# EAGLE board sch-FIX_2 (EAGLE 5.11)
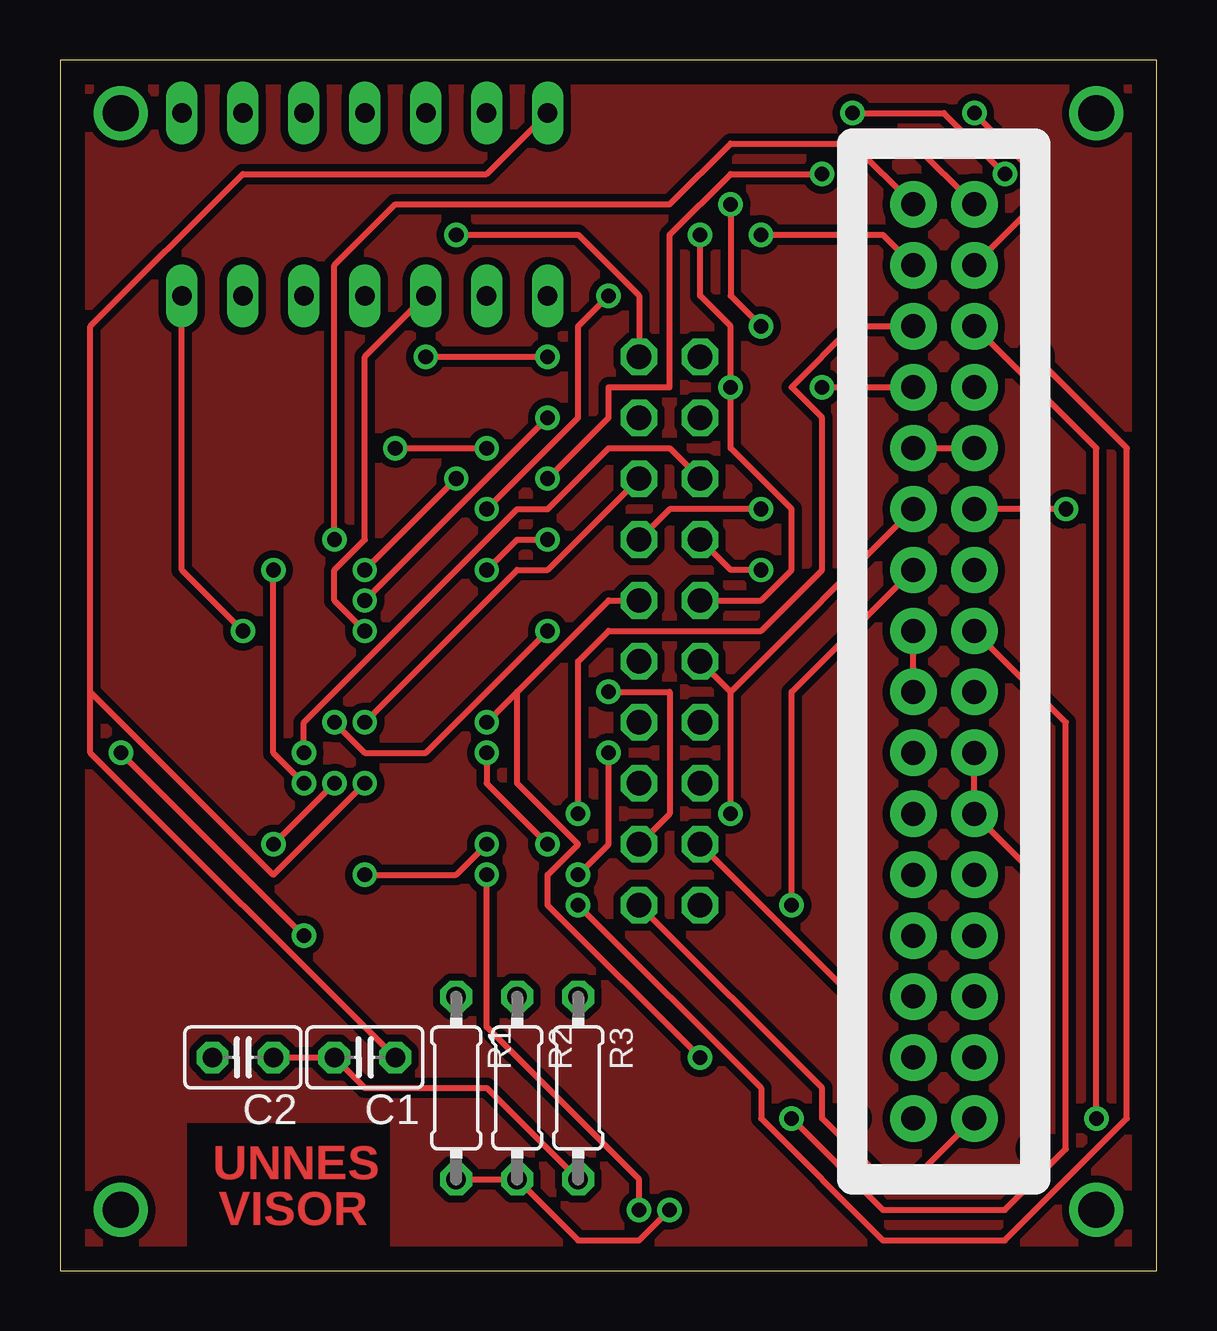
[diagram p0: board, top side]
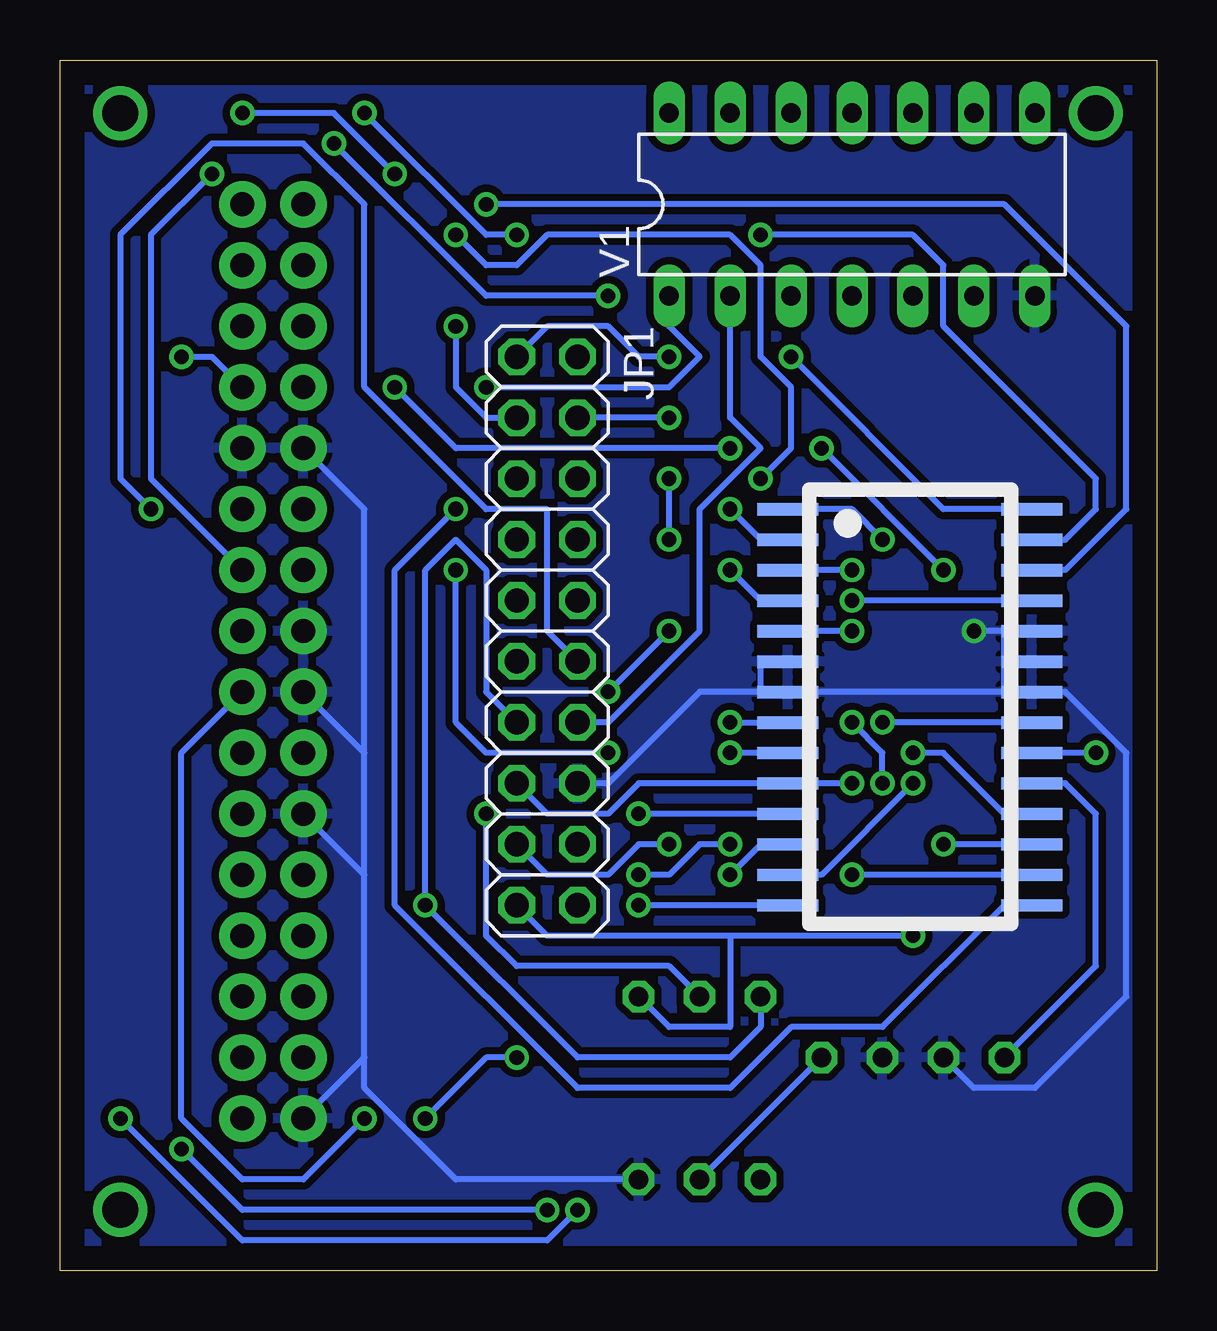
[diagram p1: board, bottom side, seen from below]

Size 45.7 x 50.47 mm. Coordinates in mm from the lower left corner, seen from the top.
Outline: 0,0 45.7,0 45.7,50.47 0,50.47 0,0
Copper layers (1*16): Top 0.035mm / dielectric 1.5mm / Bottom 0.035mm
Design rules "default": minimum track width 10mil, minimum drill 24mil, track to track 8mil, track to pad 8mil, pad to pad 8mil, via to via 8mil, smd to smd 8mil, copper to edge 40mil, drill to drill 8mil, minimum pad ring 10mil, minimum via ring 8mil, stop-mask expansion 4mil, vias tented up to drill 0mil, thermal gap 10mil

## Footprints (pad centres in the part's own frame; a part is rotated, then mirrored left to right if it is on the bottom)
C025-025X050 = drill 0.813 octagon: 1 -1.27,0; 2 1.27,0
2X10 = drill 1.016 octagon: 1 -11.43,-1.27; 2 -11.43,1.27; 3 -8.89,-1.27; 4 -8.89,1.27; 5 -6.35,-1.27; 6 -6.35,1.27; 7 -3.81,-1.27; 8 -3.81,1.27; 9 -1.27,-1.27; 10 -1.27,1.27; 11 1.27,-1.27; 12 1.27,1.27; 13 3.81,-1.27; 14 3.81,1.27; 15 6.35,-1.27; 16 6.35,1.27; 17 8.89,-1.27; 18 8.89,1.27; 19 11.43,-1.27; 20 11.43,1.27
0204/7 = drill 0.813 octagon: 1 -3.81,0; 2 3.81,0
AL422 = smd 2.54 x 0.51: 1 -5.21,7.61; 2 -5.21,6.34; 3 -5.21,5.07; 4 -5.21,3.8; 5 -5.21,2.53; 6 -5.21,1.26; 7 -5.21,-0.01; 8 -5.21,-1.28; 9 -5.21,-2.55; 10 -5.21,-3.82; 11 -5.21,-5.09; 12 -5.21,-6.36; 13 -5.21,-7.63; 14 -5.21,-8.9; 15 4.95,-8.9; 16 4.95,-7.63; 17 4.95,-6.36; 18 4.95,-5.09; 19 4.95,-3.82; 20 4.95,-2.55; 21 4.95,-1.28; 22 4.95,-0.01; 23 4.95,1.26; 24 4.95,2.53; 25 4.95,3.8; 26 4.95,5.07; 27 4.95,6.34; 28 4.95,7.61
C3088MODULE = drill 1 pad 1.93 round: P$1 -1.27,19.05; P$2 1.27,19.05; P$3 -1.27,16.51; P$4 1.27,16.51; P$5 -1.27,13.97; P$6 1.27,13.97; P$7 -1.27,11.43; P$8 1.27,11.43; P$9 -1.27,8.89; P$10 1.27,8.89; P$11 -1.27,6.35; P$12 1.27,6.35; P$13 -1.27,3.81; P$14 1.27,3.81; P$15 -1.27,1.27; P$16 1.27,1.27; P$17 -1.27,-1.27; P$18 1.27,-1.27; P$19 -1.27,-3.81; P$20 1.27,-3.81; P$21 -1.27,-6.35; P$22 1.27,-6.35; P$23 -1.27,-8.89; P$24 1.27,-8.89; P$25 -1.27,-11.43; P$26 1.27,-11.43; P$27 -1.27,-13.97; P$28 1.27,-13.97; P$29 -1.27,-16.51; P$30 1.27,-16.51; P$31 -1.27,-19.05; P$32 1.27,-19.05
DIL14 = drill 0.813 long: 1 -7.62,-3.81; 2 -5.08,-3.81; 3 -2.54,-3.81; 4 0,-3.81; 5 2.54,-3.81; 6 5.08,-3.81; 7 7.62,-3.81; 8 7.62,3.81; 9 5.08,3.81; 10 2.54,3.81; 11 0,3.81; 12 -2.54,3.81; 13 -5.08,3.81; 14 -7.62,3.81

## Placement (x,y rotation side)
C1  0.1uf  [C025-025X050]  12.7,8.89 180 top
C2  22uf  [C025-025X050]  7.62,8.89 180 top
JP1  [2X10]  25.4,26.67 270 bottom
R1  4k7  [0204/7]  16.51,7.62 270 top
R2  4k7  [0204/7]  19.05,7.62 270 top
R3  1k  [0204/7]  21.59,7.62 270 top
U$1  AL422B  [AL422]  10.16,24.13 0 bottom
U$2  C3088MODULE  [C3088MODULE]  36.83,25.4 0 top
V1  74HCT00N  [DIL14]  12.7,44.45 0 bottom

## Library data of the parts
C1 C2 R1-R3 = rcl
JP1 = pinhead
U$1 U$2 = Tugas-Akhir-Sistem-Mikroprossesor
V1 = 74ttl-din

## Nets
/FIFO_READ_RESET: JP1.18 U$1.21
DATA0: U$1.1 U$2.P$1
DATA1: U$1.2 U$2.P$2
DATA2: U$1.3 U$2.P$3
DATA3: U$1.4 U$2.P$4
DATA4: U$1.11 U$2.P$5
DATA5: U$1.12 U$2.P$6
DATA6: U$1.13 U$2.P$7
DATA7: U$1.14 U$2.P$8
FIFO_DATA_OUT0: JP1.1 U$1.28
FIFO_DATA_OUT1: JP1.2 U$1.27
FIFO_DATA_OUT2: JP1.3 U$1.26
FIFO_DATA_OUT3: JP1.4 U$1.25
FIFO_DATA_OUT4: JP1.5 U$1.18
FIFO_DATA_OUT5: JP1.6 U$1.17
FIFO_DATA_OUT6: JP1.7 U$1.16
FIFO_DATA_OUT7: JP1.8 U$1.15
FIFO_READ_CLOCK: JP1.19 R3.1 U$1.20
FIFO_WRITE_ENABLE: JP1.14 V1.2
GND: C1.2 C2.1 JP1.16 R3.2 U$1.6 U$1.7 U$1.22 U$1.23 U$1.24 U$2.P$9 U$2.P$10 U$2.P$15 U$2.P$17 U$2.P$21 U$2.P$31 V1.7
HORIZONTAL_REFERENCE: JP1.9 U$2.P$14 V1.1
N$1: JP1.20 U$2.P$32
N$2: U$1.5 V1.3
N$3: JP1.17 U$1.9 U$2.P$18
N$10: C2.2 U$1.19
OV6620_FODD: JP1.12 U$2.P$12
OV6620_SCL: JP1.13 R1.1 U$2.P$13
OV6620_SDA: JP1.11 R2.1 U$2.P$11
VCC: C1.1 JP1.15 R1.2 R2.2 U$1.10 U$2.P$20 U$2.P$22 V1.14
VERTICAL_SYNCRONIZATION: JP1.10 U$1.8 U$2.P$16

## Tracks (layer width: path | path; a pad name or v marks a point on that pad's centre or on a via)
/FIFO_READ_RESET  (via drill 0.61)
  Top 0.254: v11.43,22.86 12.7,21.59 15.24,21.59 v20.32,26.67 | v22.86,24.13 25.4,24.13 25.4,19.05 JP1.18
  Bottom 0.254: v11.43,22.86 6.35,22.86 U$1.21 | v20.32,26.67 v22.86,24.13
DATA0  (via drill 0.61)
  Top 0.254: v11.43,30.48 11.43,41.91 13.97,44.45 25.4,44.45 27.94,46.99 33.02,46.99 U$2.P$1
  Bottom 0.254: v11.43,30.48 12.7,31.75 15.24,31.75 U$1.1
DATA1  (via drill 0.61)
  Top 0.254: v17.78,31.75 21.59,35.56 21.59,39.37 v22.86,40.64 | v34.29,46.99 35.56,46.99 U$2.P$2
  Bottom 0.254: v17.78,31.75 16.51,30.48 U$1.2 | v22.86,40.64 27.94,40.64 v34.29,46.99
DATA2  (via drill 0.61)
  Top 0.254: v12.7,29.21 v16.51,33.02 | v29.21,43.18 34.29,43.18 U$2.P$3
  Bottom 0.254: v12.7,29.21 15.24,29.21 U$1.3 | v16.51,33.02 15.24,34.29 15.24,36.83 16.51,38.1 16.51,41.91 17.78,43.18 25.4,43.18 26.67,41.91 27.94,41.91 v29.21,43.18
DATA3  (via drill 0.61)
  Top 0.254: v17.78,29.21 19.05,30.48 v20.32,30.48 | v20.32,33.02 22.86,35.56 22.86,36.83 25.4,36.83 25.4,43.18 27.94,45.72 v31.75,45.72 | v38.1,48.26 40.64,45.72 40.64,44.45 U$2.P$4
  Bottom 0.254: v17.78,29.21 16.51,27.94 U$1.4 | v20.32,30.48 v20.32,33.02 | v31.75,45.72 34.29,48.26 v38.1,48.26
DATA4  (via drill 0.61)
  Top 0.254: v21.59,19.05 21.59,25.4 22.86,26.67 29.21,26.67 31.75,29.21 31.75,35.56 30.48,36.83 33.02,39.37 U$2.P$5
  Bottom 0.254: v21.59,19.05 16.51,19.05 U$1.11
DATA5  (via drill 0.61)
  Top 0.254: v17.78,16.51 17.78,10.16 24.13,3.81 v24.13,2.54 | v43.18,6.35 43.18,34.29 U$2.P$6
  Bottom 0.254: v17.78,16.51 16.51,17.78 U$1.12 | v24.13,2.54 25.4,1.27 38.1,1.27 v43.18,6.35
DATA6  (via drill 0.61)
  Top 0.254: v10.16,20.32 8.89,21.59 v8.89,29.21 | v13.97,34.29 v17.78,34.29 | v31.75,36.83 U$2.P$7
  Bottom 0.254: v10.16,20.32 13.97,16.51 15.24,16.51 U$1.13 | v8.89,29.21 v13.97,34.29 | v17.78,34.29 29.21,34.29 v31.75,36.83
DATA7  (via drill 0.61)
  Top 0.254: v21.59,15.24 29.21,7.62 29.21,6.35 34.29,1.27 39.37,1.27 44.45,6.35 44.45,34.29 v40.64,38.1
  Bottom 0.254: v21.59,15.24 16.51,15.24 U$1.14 | v40.64,38.1 39.37,38.1 U$2.P$8
FIFO_DATA_OUT0  (via drill 0.61)
  Top 0.254: v15.24,38.1 v20.32,38.1
  Bottom 0.254: v15.24,38.1 8.89,31.75 6.35,31.75 U$1.28 | v20.32,38.1 21.59,38.1 22.86,39.37 25.4,39.37 JP1.1
FIFO_DATA_OUT1  (via drill 0.61)
  Top 0.254: v16.51,43.18 21.59,43.18 24.13,40.64 JP1.2
  Bottom 0.254: v16.51,43.18 10.16,43.18 8.89,41.91 8.89,39.37 2.54,33.02 2.54,31.75 3.81,30.48 5.08,30.48 U$1.27
FIFO_DATA_OUT2  (via drill 0.61)
  Top 0.254: v27.94,44.45 27.94,40.64 v29.21,39.37
  Bottom 0.254: v27.94,44.45 6.35,44.45 1.27,39.37 1.27,31.75 3.81,29.21 5.08,29.21 U$1.26 | v29.21,39.37 29.21,36.83 27.94,35.56 JP1.3
FIFO_DATA_OUT3  (via drill 0.61)
  Top 0.254: v12.7,27.94 v20.32,35.56
  Bottom 0.254: v12.7,27.94 6.35,27.94 U$1.25 | v20.32,35.56 JP1.4
FIFO_DATA_OUT4  (via drill 0.61)
  Top 0.254: v10.16,21.59 10.16,22.86 19.05,31.75 20.32,31.75 22.86,34.29 25.4,34.29 JP1.5
  Bottom 0.254: v10.16,21.59 8.89,21.59 6.35,19.05 U$1.18
FIFO_DATA_OUT5  (via drill 0.61)
  Top 0.254: v8.89,17.78 v11.43,20.32 | v12.7,22.86 19.05,29.21 20.32,29.21 JP1.6
  Bottom 0.254: v8.89,17.78 6.35,17.78 U$1.17 | v11.43,20.32 11.43,21.59 v12.7,22.86
FIFO_DATA_OUT6  (via drill 0.61)
  Top 0.254: v12.7,16.51 16.51,16.51 v17.78,17.78 | v21.59,16.51 22.86,17.78 v22.86,21.59 | v29.21,29.21 27.94,29.21 JP1.7
  Bottom 0.254: v12.7,16.51 6.35,16.51 U$1.16 | v17.78,17.78 19.05,17.78 20.32,16.51 v21.59,16.51 | v22.86,21.59 27.94,21.59 29.21,22.86 v29.21,29.21
FIFO_DATA_OUT7  (via drill 0.61)
  Top 0.254: v29.21,31.75 25.4,31.75 JP1.8
  Bottom 0.254: v29.21,31.75 31.75,29.21 31.75,15.24 24.13,7.62 17.78,7.62 15.24,10.16 11.43,10.16 6.35,15.24 U$1.15
FIFO_READ_CLOCK  (via drill 0.61)
  Top 0.254: v10.16,13.97 v2.54,21.59
  Bottom 0.254: v2.54,21.59 5.08,21.59 U$1.20 | 17.78,13.97 25.4,13.97 JP1.19 | v10.16,13.97 17.78,13.97 | R3.1 20.32,10.16 17.78,10.16 17.78,13.97
FIFO_WRITE_ENABLE
  Bottom 0.254: V1.2 17.78,35.56 16.51,34.29 19.05,31.75 19.05,26.67 22.86,22.86 JP1.14
GND  (via drill 0.61)
  Top 0.254: V1.7 5.08,29.21 v7.62,26.67 | C2.1 C1.2 12.7,7.62 17.78,7.62 R3.2 | U$2.P$9 U$2.P$10 | U$2.P$17 U$2.P$15
  Bottom 0.254: 16.51,24.13 16.51,25.4 U$1.6 | 6.35,24.13 6.35,25.4 | 6.35,25.4 6.35,26.67 | 6.35,25.4 U$1.23 | 6.35,26.67 v7.62,26.67 | 6.35,26.67 U$1.24 | 6.35,24.13 15.24,24.13 U$1.7 16.51,24.13 | 6.35,24.13 U$1.22 5.08,24.13 3.81,24.13 1.27,21.59 1.27,11.43 5.08,7.62 7.62,7.62 C2.1 | JP1.16 22.86,20.32 19.05,24.13 16.51,24.13 | 33.02,8.89 U$2.P$31 | 33.02,8.89 33.02,16.51 | 33.02,16.51 U$2.P$21 | 33.02,21.59 U$2.P$17 | 33.02,16.51 33.02,21.59 | U$2.P$9 33.02,31.75 33.02,21.59 | R3.2 29.21,3.81 33.02,7.62 33.02,8.89
  pour Bottom (isolate 0.305): 0,50.8 45.72,50.8 45.72,0 0,0
HORIZONTAL_REFERENCE  (via drill 0.61)
  Top 0.254: JP1.9 29.21,27.94 30.48,29.21 30.48,31.75 27.94,34.29 v27.94,36.83 27.94,39.37 26.67,40.64 v26.67,43.18 | v39.37,45.72 36.83,48.26 v33.02,48.26
  Bottom 0.254: V1.1 20.32,39.37 19.05,38.1 20.32,36.83 v27.94,36.83 | U$2.P$14 41.91,33.02 41.91,43.18 v39.37,45.72 | v33.02,48.26 27.94,43.18 v26.67,43.18
N$1
  Top 0.254: JP1.20 31.75,7.62 31.75,6.35 34.29,3.81 35.56,3.81 U$2.P$32
N$2  (via drill 0.61)
  Top 0.254: v12.7,26.67 11.43,27.94 11.43,29.21 12.7,30.48 12.7,38.1 V1.3
  Bottom 0.254: v12.7,26.67 15.24,26.67 U$1.5
N$3  (via drill 0.61)
  Top 0.254: v17.78,21.59 17.78,20.32 v20.32,17.78 | v33.02,6.35 33.02,11.43 JP1.17
  Bottom 0.254: v17.78,21.59 16.51,21.59 U$1.9 | v20.32,17.78 21.59,17.78 22.86,16.51 25.4,16.51 JP1.17 | U$2.P$18 40.64,21.59 40.64,6.35 38.1,3.81 35.56,3.81 v33.02,6.35
N$4  (via drill 1.5 pad 1.78)
  other vias: 2.54,48.26
N$5  (via drill 1.5 pad 1.78)
  other vias: 43.18,48.26
N$6  (via drill 1.5 pad 1.78)
  other vias: 2.54,2.54
N$7  (via drill 1.5 pad 1.78)
  other vias: 43.18,2.54
N$8
  pour Bottom (isolate 0.305): 0,50.8 45.72,50.8 45.72,0 0,0
N$9
  pour Top (isolate 0.305): 0,50.8 45.72,50.8 45.72,0 13.97,0 13.97,6.35 5.08,6.35 5.08,0 0,0
N$10
  Bottom 0.254: C2.2 2.54,12.7 2.54,19.05 3.81,20.32 5.08,20.32 U$1.19
N$11
  pour Top (isolate 0.305): 0,50.8 45.72,50.8 45.72,0 13.97,0 13.97,6.35 5.08,6.35 5.08,0 0,0
OV6620_FODD  (via drill 0.61)
  Top 0.254: v41.91,31.75 U$2.P$12
  Bottom 0.254: JP1.12 25.4,26.67 25.4,31.75 27.94,31.75 33.02,36.83 33.02,44.45 35.56,46.99 39.37,46.99 43.18,43.18 43.18,33.02 v41.91,31.75
OV6620_SCL  (via drill 0.61)
  Top 0.254: v30.48,15.24 30.48,24.13 U$2.P$13
  Bottom 0.254: R1.1 16.51,10.16 17.78,8.89 24.13,8.89 v30.48,15.24 30.48,29.21 29.21,30.48 27.94,29.21 27.94,24.13 JP1.13
OV6620_SDA  (via drill 0.61)
  Top 0.254: v27.94,19.05 27.94,24.13 | 27.94,24.13 JP1.11 | 27.94,24.13 U$2.P$11
  Bottom 0.254: R2.1 20.32,12.7 26.67,12.7 27.94,13.97 v27.94,19.05
VCC  (via drill 0.61)
  Top 0.254: U$2.P$20 U$2.P$22 40.64,16.51 v40.64,5.08 | R1.2 R2.2 21.59,1.27 24.13,1.27 v25.4,2.54 | V1.14 17.78,45.72 7.62,45.72 1.27,39.37 1.27,24.13 | 1.27,24.13 1.27,21.59 C1.1 | v12.7,20.32 8.89,16.51 1.27,24.13
  Bottom 0.254: JP1.15 25.4,19.05 22.86,19.05 21.59,20.32 16.51,20.32 U$1.10 15.24,20.32 v12.7,20.32 | R2.2 C1.1 | v40.64,5.08 38.1,2.54 v25.4,2.54
VERTICAL_SYNCRONIZATION  (via drill 0.61)
  Top 0.254: 19.05,24.13 22.86,27.94 JP1.10 | 19.05,24.13 v17.78,22.86 | U$2.P$16 41.91,22.86 41.91,5.08 39.37,2.54 34.29,2.54 v30.48,6.35 | v26.67,8.89 20.32,15.24 20.32,16.51 21.59,17.78 19.05,20.32 19.05,24.13
  Bottom 0.254: v17.78,22.86 16.51,22.86 U$1.8 | v30.48,6.35 27.94,8.89 v26.67,8.89

## Text on the board
Top: UNNES | VISOR